# EAGLE board chaprshield (EAGLE 6.4)

Size 70.92 x 54.09 mm. Coordinates in mm from the lower left corner, seen from the top.
Outline: 0,7.03 24.05,7 23.95,0 70.92,0.03 70.92,54.09 0,54.09 0,7.03
Copper layers (1*16): Top 0.035mm / dielectric 1.5mm / Bottom 0.035mm
Design rules "default *": minimum track width 10mil, minimum drill 24mil, track to track 8mil, track to pad 8mil, pad to pad 8mil, via to via 9mil, smd to smd 9mil, copper to edge 40mil, drill to drill 8mil, minimum pad ring 10mil, minimum via ring 8mil, stop-mask expansion 4mil, vias tented up to drill 0mil, thermal gap 10mil
Net classes: 1 GND: width 0.635 mm
Holes 3.5 mm at 68.06,50.27 68.06,7.6 33.82,7.47
tRestrict: area 39,26.8 to 41.5,29.4; area 51.8,26.7 to 54.3,29.3; area 39.2,1.8 to 54.4,12; area 31.9,5.4 to 35.9,9.4; area 66.1,5.6 to 70.1,9.6; area 66.2,48.3 to 70.2,52.3
bRestrict: area 39,26.8 to 41.5,29.4; area 51.8,26.7 to 54.3,29.3; area 39.1,1.8 to 54.3,12; area 66,5.6 to 70.2,9.6; area 66.2,48.4 to 70.3,52.3; area 31.8,5.5 to 35.9,9.4

## Footprints (pad centres in the part's own frame; a part is rotated, then mirrored left to right if it is on the bottom)
22-23-2021 = drill 1 long: 1 -1.27,0; 2 1.27,0
PROMINI = drill 1.016 pad 1.88: A0 6.35,-5.08; A1 6.35,-2.54; A2 6.35,0; A3 6.35,2.54; A4 3.429,1.397; A5 3.429,3.937; A6 3.429,-9.017; A7 3.429,-6.477; BLK -7.62,15.24; D2 -8.89,2.54; D3 -8.89,0; D4 -8.89,-2.54; D5 -8.89,-5.08; D6 -8.89,-7.62; D7 -8.89,-10.16; D8 -8.89,-12.7; D9 -8.89,-15.24; D10 6.35,-15.24; D11 6.35,-12.7; D12 6.35,-10.16; D13 6.35,-7.62; GND -8.89,5.08; GND2 6.35,10.16; GND3 -5.08,15.24; GRN 5.08,15.24; RAWV 6.35,12.7; RST -8.89,7.62; RST2 6.35,7.62; RXI -8.89,10.16; RXI2 0,15.24; TXO -8.89,12.7; TXO2 2.54,15.24; VCC 6.35,5.08; VCC2 -2.54,15.24
1X02 = drill 1.016 long: 1 -1.27,0; 2 1.27,0
LED3MM = drill 0.813 octagon: A -1.27,0; K 1.27,0
RN41 = smd 0.8 x 1.6: 1 -6.6,-6.6; 2 -5.4,-6.6; 3 -4.2,-6.6; 4 -3,-6.6; 5 -1.8,-6.6; 6 -0.6,-6.6; 7 0.6,-6.6; 8 1.8,-6.6; 9 3,-6.6; 10 4.2,-6.6; 11 5.4,-6.6; 12 6.6,-6.6; 13 6.6,6.6; 14 5.4,6.6; 15 4.2,6.6; 16 3,6.6; 17 1.8,6.6; 18 0.6,6.6; 19 -0.6,6.6; 20 -1.8,6.6; 21 -3,6.6; 22 -4.2,6.6; 23 -5.4,6.6; 24 -6.6,6.6 | smd 1.6 x 0.8: 25 -9.4,4.8; 26 -9.4,3.2; 27 -9.4,1.6; 28 9.4,3.1; 29 9.4,-3.1; 30 9.4,-4.122; 31 9.4,-1.9; 32 9.4,-0.7; 33 9.4,0.7; 34 9.4,1.9; 35 9.4,4.122
2-PIN-PUSHBUTTON = drill 2.2 pad 3.048: P$1 -1.778,0; P$2 2.921,0
0207/10 = drill 0.813 octagon: 1 -5.08,0; 2 5.08,0
SPEAKER = drill 0.9 square: + -2.032,0; - 2.032,0
VDIP2 = drill 0.813 long: 1 -24.13,-7.62; 2 -21.59,-7.62; 3 -19.05,-7.62; 4 -16.51,-7.62; 5 -13.97,-7.62; 6 -11.43,-7.62; 7 -8.89,-7.62; 8 -6.35,-7.62; 9 -3.81,-7.62; 10 -1.27,-7.62; 11 1.27,-7.62; 12 3.81,-7.62; 13 6.35,-7.62; 14 8.89,-7.62; 15 11.43,-7.62; 16 13.97,-7.62; 17 16.51,-7.62; 18 19.05,-7.62; 19 21.59,-7.62; 20 24.13,-7.62; 21 24.13,7.62; 22 21.59,7.62; 23 19.05,7.62; 24 16.51,7.62; 25 13.97,7.62; 26 11.43,7.62; 27 8.89,7.62; 28 6.35,7.62; 29 3.81,7.62; 30 1.27,7.62; 31 -1.27,7.62; 32 -3.81,7.62; 33 -6.35,7.62; 34 -8.89,7.62; 35 -11.43,7.62; 36 -13.97,7.62; 37 -16.51,7.62; 38 -19.05,7.62; 39 -21.59,7.62; 40 -24.13,7.62

## Placement (x,y rotation side)
-  9v power  [22-23-2021]  66.37,43.56 270 top
ARD  PROMINI  [PROMINI]  17.77,21.77 90 top
JP1  [1X02]  66.26,35.65 0 top
LED1  [LED3MM]  66.7,26.5 90 top
LED2  [LED3MM]  61.41,26.55 90 top
M2  RN42 Module  [RN41]  46.71,19.21 90 top
PB1  PUSHBUTTON  [2-PIN-PUSHBUTTON]  64.41,16.79 90 top
R1  19.1k  [0207/10]  36.09,44.66 180 top
R2  19.1k  [0207/10]  22.19,40.48 180 top
R3  19.1k  [0207/10]  13.77,18.22 0 top
R4  10k  [0207/10]  26.69,21.63 180 top
R5  10k  [0207/10]  13.94,21.69 180 top
R6  10k  [0207/10]  22.25,44.93 0 top
R7  470  [0207/10]  50.1,40.22 180 top
R8  470  [0207/10]  36.2,40.32 180 top
R9  100  [0207/10]  26.76,18.23 180 top
R10  10k  [0207/10]  62.35,31.03 0 top
R11  10k  [0207/10]  49.98,44.65 180 top
U$2  SPEAKER  [SPEAKER]  60,7.23 90 top
VDIP  VDIP2  [VDIP2]  36.11,42.22 0 top

## Library data of the parts
- = con-molex; MF: MOLEX; MPN: 22-23-2021; OC_FARNELL: 1462926; OC_NEWARK: 25C3832
ARD PB1 U$2 VDIP = ChapR-Custom
JP1 = pinhead
LED1 LED2 = led
M2 = SparkFun-RF
R1-R11 = resistor

## Nets
3.3V [GND]: JP1.2 M2.11 VDIP.32 VDIP.38 VDIP.39
+9V [GND]: -.2 ARD.RAWV
GND [GND]: -.1 ARD.GND ARD.GND2 LED1.K LED2.K M2.1 M2.12 M2.28 M2.29 R1.1 R2.1 R3.1 R10.1 R11.1 U$2.- VDIP.12 VDIP.13 VDIP.15 VDIP.26
LED1(BD5): VDIP.4
LED2(BD6): VDIP.5
N$1: ARD.VCC PB1.P$1 VDIP.2 VDIP.3 VDIP.9
N$2: ARD.D10 VDIP.30
N$3: ARD.D13 R6.2
N$4: ARD.D12 M2.14
N$5: ARD.D11 M2.5
N$6: M2.3 R1.2 R4.1
N$7: M2.4 R2.2 R5.1
N$8: ARD.D5 R5.2
N$9: M2.13 R3.2 R6.1
N$10: ARD.D9 VDIP.18
N$11: ARD.D8 VDIP.17
N$12: ARD.D7 VDIP.16
N$13: ARD.D6 VDIP.14
N$14: ARD.D4 R4.2
N$15: ARD.D3 M2.19
N$16: LED2.A R7.1
N$17: LED1.A R8.1
N$18: ARD.A2 R7.2
N$19: R9.1 U$2.+
N$20: ARD.A1 R8.2
N$21: ARD.A3 R9.2
N$22: JP1.1 M2.22 R11.2
N$24: ARD.A0 PB1.P$2 R10.2
NC(1): VDIP.1
NC(2): VDIP.40

## Tracks (layer width: path | path; a pad name or v marks a point on that pad's centre or on a via)
3.3V  (4 unrouted)
+9V  (1 unrouted)
GND  (18 unrouted)
N$1  (4 unrouted)
N$2  (1 unrouted)
N$3  (1 unrouted)
N$4  (1 unrouted)
N$5  (1 unrouted)
N$6  (2 unrouted)
N$7  (2 unrouted)
N$8  (1 unrouted)
N$9  (2 unrouted)
N$10  (1 unrouted)
N$11  (1 unrouted)
N$12  (1 unrouted)
N$13  (1 unrouted)
N$14  (1 unrouted)
N$15  (1 unrouted)
N$16  (1 unrouted)
N$17  (1 unrouted)
N$18  (1 unrouted)
N$19  (1 unrouted)
N$20  (1 unrouted)
N$21  (1 unrouted)
N$22  (2 unrouted)
N$24  (2 unrouted)

## Text on the board
tPlace: ChapR v0.3